# EAGLE board eeeeeeeeeeeeeeeeeeeeeeeee (EAGLE 9.7.0)

Size 145.74 x 93.12 mm. Coordinates in mm from the lower left corner, seen from the top.
Outline: 0,0 145.74,0 145.74,93.12 0,93.12 0,0
Copper layers (1*16): Top 0.035mm / dielectric 1.5mm / Bottom 0.035mm
Design rules "default": minimum track width 6mil, minimum drill 0.35mm, track to track 6mil, track to pad 6mil, pad to pad 6mil, via to via 6mil, smd to smd 6mil, copper to edge 40mil, drill to drill 6mil, minimum pad ring 10mil, minimum via ring 8mil, stop-mask expansion 4mil, vias tented up to drill 0mil, thermal gap 10mil

## Footprints (pad centres in the part's own frame; a part is rotated, then mirrored left to right if it is on the bottom)
LEDRD254W60D565H860B_G = drill 0.981 pad 1.581: 1 -1.27,0; 2 1.27,0
LEDRD254W60D565H860B_Y = drill 0.981 pad 1.581: 1 -1.27,0; 2 1.27,0
LEDRD254W60D565H860B_O = drill 0.981 pad 1.581: 1 -1.27,0; 2 1.27,0
LEDRD254W60D565H860B = drill 0.981 pad 1.581: 1 -1.27,0; 2 1.27,0
LEDRD254W60D565H860B_W = drill 0.981 pad 1.581: 1 -1.27,0; 2 1.27,0
LEDRD254W60D565H860B_B = drill 0.981 pad 1.581: 1 -1.27,0; 2 1.27,0
RESAD1016W63L850D250B = drill 0.83 pad 1.43: 1 -5.08,0; 2 5.08,0
SWITCH-MOMENTARY-PTH-6.5MM = drill 1.016 pad 1.88: 1 -3.251,2.261; 2 3.251,2.261; 3 -3.251,-2.261; 4 3.251,-2.261
ARDUINO-UNO-R3-SHIELD = drill 1.016 pad 1.88: 3.3V 24.13,-2.54; 5V 24.13,0; A0 24.13,12.7; A1 24.13,15.24; A2 24.13,17.78; A3 24.13,20.32; A4 24.13,22.86; A5 24.13,25.4; AREF -24.13,-13.97; D2 -24.13,20.32; D3 -24.13,17.78; D4 -24.13,15.24; D5 -24.13,12.7; D6 -24.13,10.16; D7 -24.13,7.62; D8 -24.13,3.81; D9 -24.13,1.27; D10 -24.13,-1.27; D11 -24.13,-3.81; D12 -24.13,-6.35; D13 -24.13,-8.89; GND@0 24.13,2.54; GND@1 24.13,5.08; GND@2 -24.13,-11.43; IOREF 24.13,-7.62; NC 24.13,-10.16; RES 24.13,-5.08; RX -24.13,25.4; SCL -24.13,-19.05; SDA -24.13,-16.51; TX -24.13,22.86; VIN 24.13,7.62

## Placement (x,y rotation side)
D1  GREEN  [LEDRD254W60D565H860B_G]  76.49,38.02 270 top
D2  YELLOW  [LEDRD254W60D565H860B_Y]  68.87,38.02 270 top
D3  ORANGE  [LEDRD254W60D565H860B_O]  61.25,38.02 270 top
D4  RED  [LEDRD254W60D565H860B]  53.63,38.02 270 top
D5  WHITE  [LEDRD254W60D565H860B_W]  46.01,38.02 270 top
D6  BLUE  [LEDRD254W60D565H860B_B]  38.39,38.02 270 top
D7  GREEN  [LEDRD254W60D565H860B_G]  30.77,38.02 270 top
D8  YELLOW  [LEDRD254W60D565H860B_Y]  23.15,38.02 270 top
D9  ORANGE  [LEDRD254W60D565H860B_O]  15.53,38.02 270 top
D10  RED  [LEDRD254W60D565H860B]  7.91,38.02 270 top
R1  200  [RESAD1016W63L850D250B]  41.88,54.77 0 top
R2  200  [RESAD1016W63L850D250B]  25.19,55.06 0 top
R4  200  [RESAD1016W63L850D250B]  23.06,58.49 0 top
R5  200  [RESAD1016W63L850D250B]  20.98,61.98 0 top
R6  200  [RESAD1016W63L850D250B]  19.78,66.06 0 top
R7  200  [RESAD1016W63L850D250B]  18.04,69.8 0 top
R8  200  [RESAD1016W63L850D250B]  16.73,74.01 0 top
R9  200  [RESAD1016W63L850D250B]  15.45,77.28 0 top
R10  200  [RESAD1016W63L850D250B]  14.04,81.24 0 top
R11  200  [RESAD1016W63L850D250B]  12.83,85.02 0 top
R12  1k  [RESAD1016W63L850D250B]  69.01,8.97 90 top
S1  SWITCH_MOMENTARY  [SWITCH-MOMENTARY-PTH-6.5MM]  66.47,17.86 90 top
U1  ARDUINO-UNO-R3-SHIELD  [ARDUINO-UNO-R3-SHIELD]  115.9,58.6 0 top

## Library data of the parts
D1 D7 = Tinkercad; CATEGORY: Opto-Electronic; SUB-CATEGORY: LED; VALUE: LED_GREEN
D2 D8 = Tinkercad; CATEGORY: Opto-Electronic; SUB-CATEGORY: LED; VALUE: LED_YELLOW
D3 D9 = Tinkercad; CATEGORY: Opto-Electronic; SUB-CATEGORY: LED; VALUE: LED_ORANGE
D4 D10 = Tinkercad; CATEGORY: Opto-Electronic; SUB-CATEGORY: LED; VALUE: LED_RED
D5 = Tinkercad; CATEGORY: Opto-Electronic; SUB-CATEGORY: LED; VALUE: LED_WHITE
D6 = Tinkercad; CATEGORY: Opto-Electronic; SUB-CATEGORY: LED; VALUE: LED_BLUE
R1 R2 R4-R12 S1 U1 = Tinkercad

## Nets
D1_A: D1.1 R1.1
D2_A: D2.1 R2.1
D3_A: D3.1 R4.1
D4_A: D4.1 R5.1
D5_A: D5.1 R6.1
D6_A: D6.1 R7.1
D7_A: D7.1 R8.1
D8_A: D8.1 R9.1
D9_A: D9.1 R10.1
D10_A: D10.1 R11.1
U1_5V: S1.1 U1.5V
U1_D2: R11.2 U1.D2
U1_D3: R10.2 U1.D3
U1_D4: R9.2 U1.D4
U1_D5: R8.2 U1.D5
U1_D6: R7.2 U1.D6
U1_D7: R6.2 U1.D7
U1_D8: R5.2 U1.D8
U1_D9: R4.2 U1.D9
U1_D10: R2.2 U1.D10
U1_D11: R1.2 U1.D11
U1_D13: R12.2 S1.3 S1.4 U1.D13
U1_GND: D1.2 D2.2 D3.2 D4.2 D5.2 D6.2 D7.2 D8.2 D9.2 D10.2 R12.1 U1.GND@0 U1.GND@1 U1.GND@2

## Tracks (layer width: path | path; a pad name or v marks a point on that pad's centre or on a via)
D1_A  (1 unrouted)
D2_A  (1 unrouted)
D3_A  (1 unrouted)
D4_A  (1 unrouted)
D5_A  (1 unrouted)
D6_A  (1 unrouted)
D7_A  (1 unrouted)
D8_A  (1 unrouted)
D9_A  (1 unrouted)
D10_A  (1 unrouted)
U1_5V  (1 unrouted)
U1_D2  (1 unrouted)
U1_D3  (1 unrouted)
U1_D4  (1 unrouted)
U1_D5  (1 unrouted)
U1_D6  (1 unrouted)
U1_D7  (1 unrouted)
U1_D8  (1 unrouted)
U1_D9  (1 unrouted)
U1_D10  (1 unrouted)
U1_D11  (1 unrouted)
U1_D13  (3 unrouted)
U1_GND  (13 unrouted)